# Altium PCB 74HC595.PcbDoc
Units mil, origin at the board's own origin, x right, y up, seen from the top; angles counter-clockwise.
Board outline 6000 x 4000 mil, 2 copper layers (Top Layer, Bottom Layer); 11 components, 10 nets, 52 pads, 1 vias.
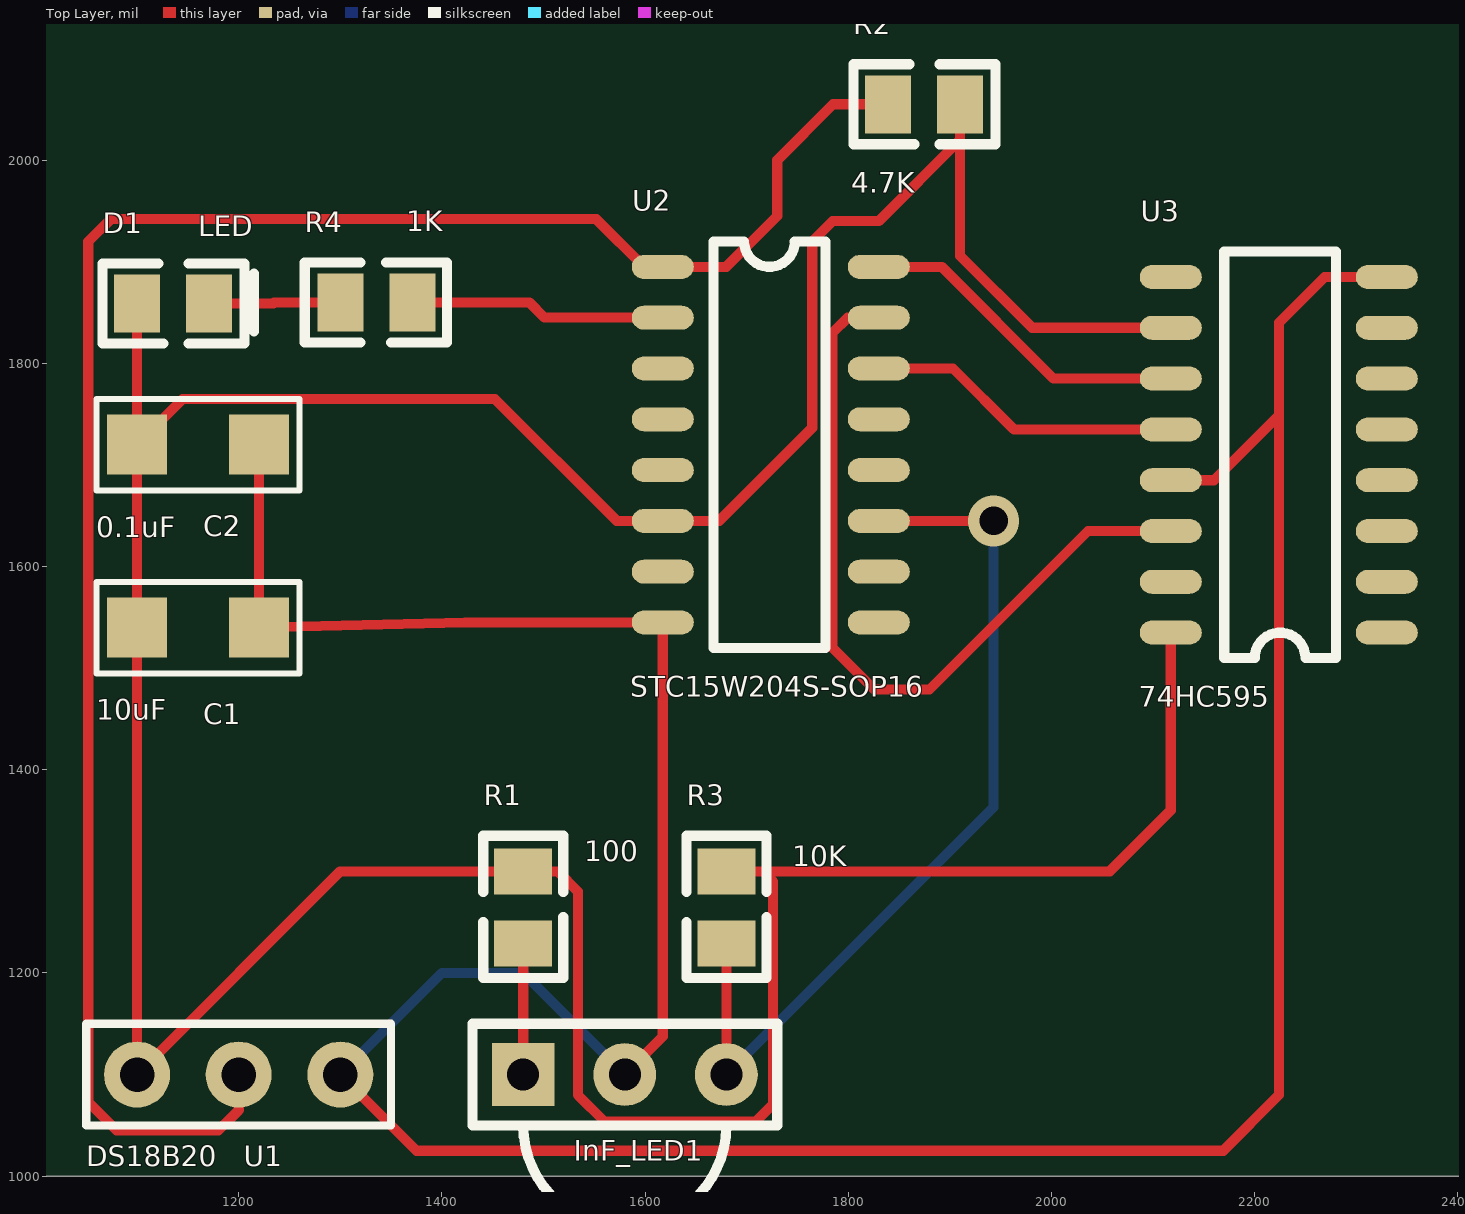
[diagram p0: Top Layer view]
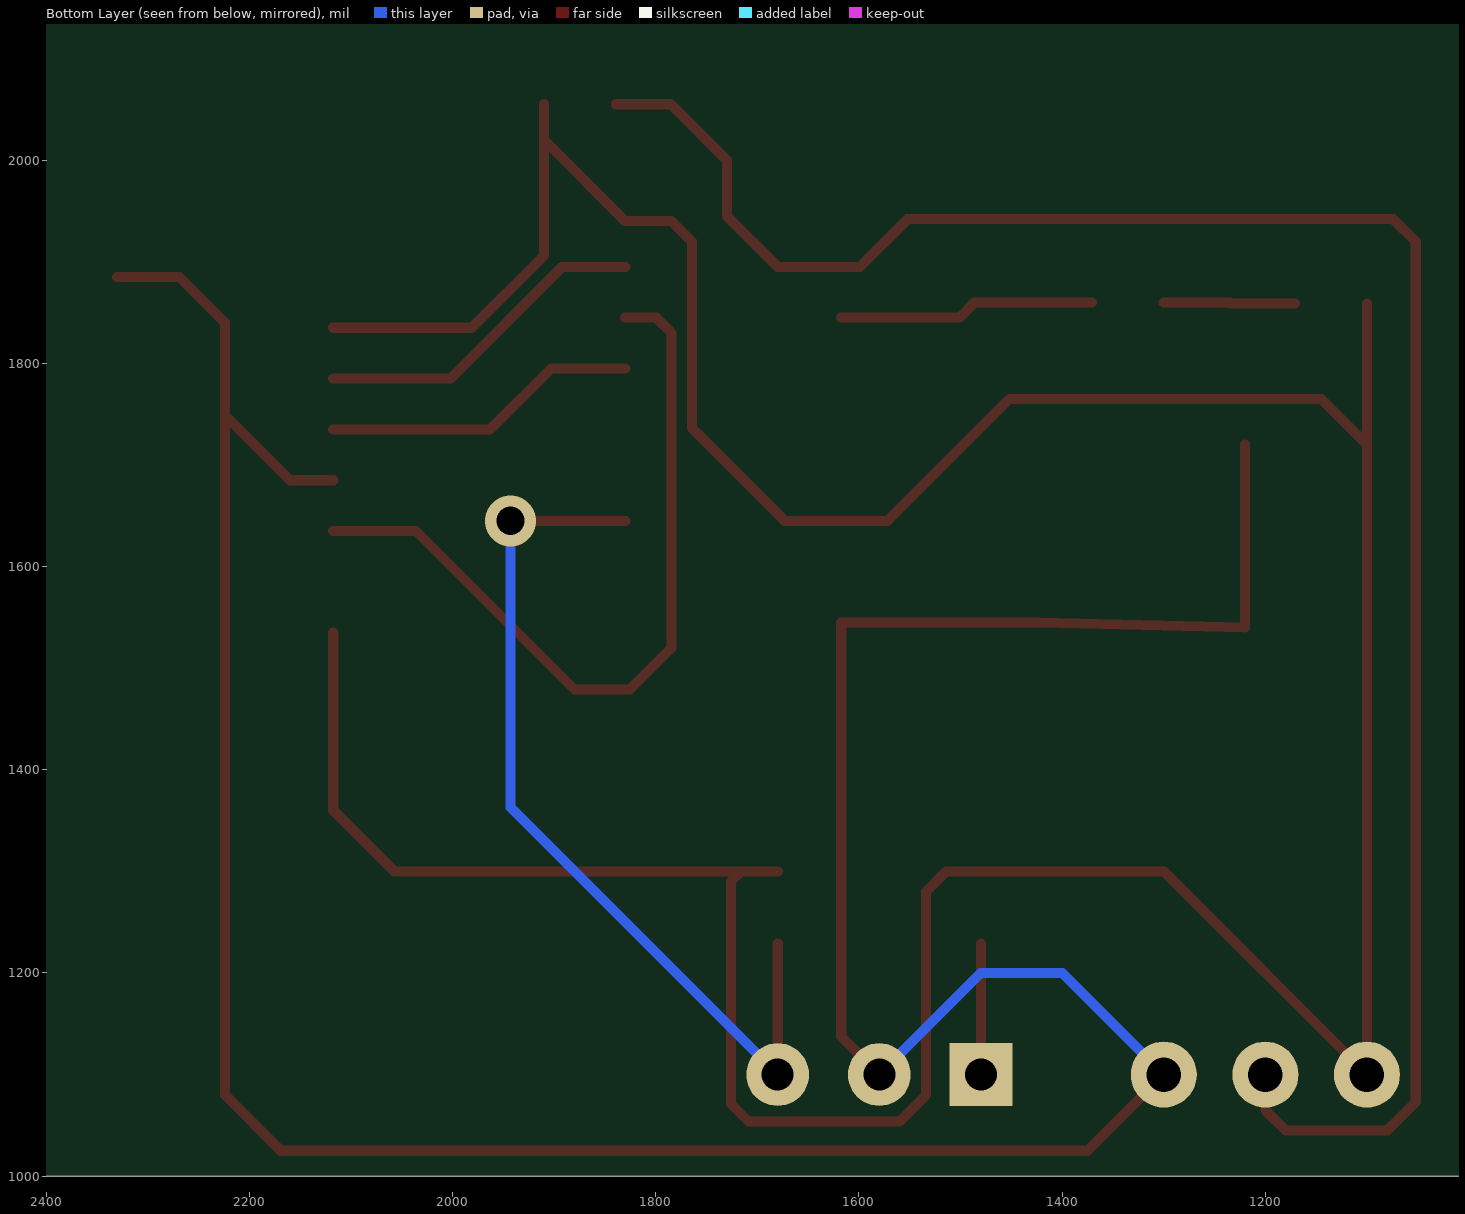
[diagram p1: Bottom Layer view, seen from below]
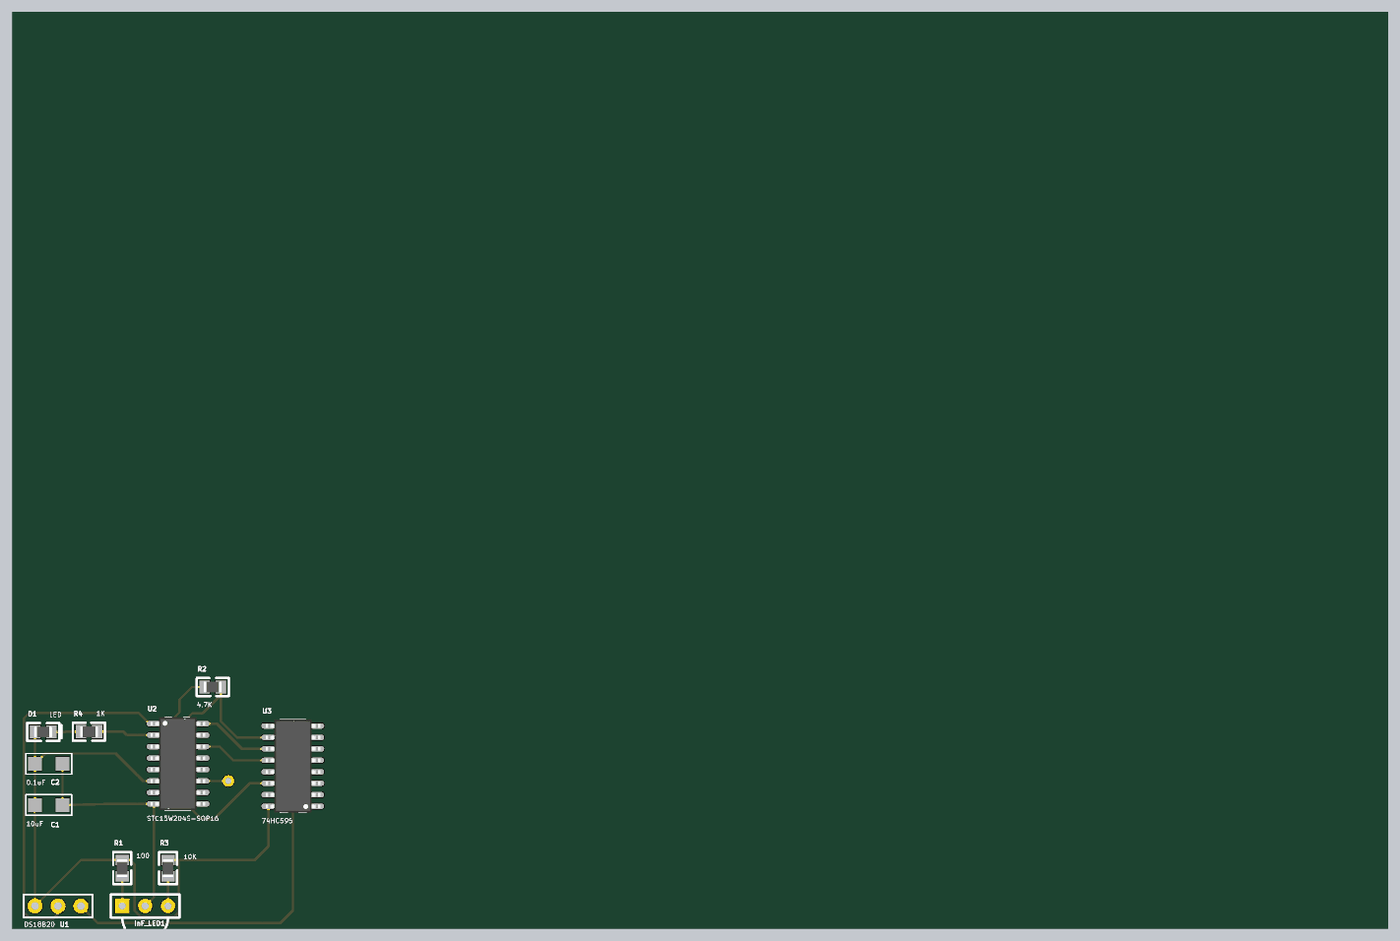
[diagram p2: 3D render of the assembled board from above, using the file's embedded part models]

## Layer stack, top to bottom
Top Solder: solder mask 0.4, Solder Resist, Dk 3.5
Top Layer: signal copper 1.4
Dielectric1: dielectric 12.6, FR-4, Dk 4.8
Bottom Layer: signal copper 1.4
Bottom Solder: solder mask 0.4, Solder Resist, Dk 3.5

## Board outline
1000,1000 7000,1000 7000,5000 1000,5000

## Design rules (kind name [scope] priority, off if disabled: settings)
Clearance [All] p1: gap=10
FabricationTestPointUsage TestPointUsage [All] p1: valid=0 allowmultiple=FALSE
FabricationTestpoint Testpoint [All] p1: side=3 testpointundercomponent=TRUE minsize=40 maxsize=100 preferedsize=60 minholesize=0 maxholesize=40 preferedholesize=32 testpointgrid=1 allowsidetop=TRUE allowsidebottom=TRUE usegrid=TRUE gridtolerance=0.01
PolygonConnect [All] p1: connectstyle=Relief reliefconductorwidth=10 reliefentries=4 polygonreliefangle="90 Angle" airgapwidth=10
RoutingVias [All] p1: holewidth=28 width=50 viastyle="Through Hole" minholewidth=28 minwidth=50 maxholewidth=28 maxwidth=50
SilkToSolderMaskClearance SilkscreenOverComponentPads [IsPad] p1: minsilkscreentomaskgap=10 clearancetoexposedcopper=TRUE
SolderMaskExpansion [All] p1: expansion=4
Width [All] p1: maxlimit=10 minlimit=10 preferedwidth=10
27 further rules are at their usual default settings.

## Components (designator, comment, footprint, x,y, rotation, side; value= is the part's Value field where it differs from the comment)
C1 "10uF" RES 1220,1540 r180 top
C2 "0.1uF" RES 1220,1720 r180 top
D1 "LED" LED0805 1100,1860 r180 top
InF_LED1 "Infrared_LED" IR 1480,1100 r0 top
R1 "100" RES0805 1480,1300 r270 top
R2 "4.7K" RES0805 1910,2055 r180 top
R3 "10K" RES0805 1680,1300 r270 top
R4 "1K" RES0805 1300,1860 r0 top
U1 "DS18B20" 3PIN 1300,1100 r180 top
U2 "STC15W204S-SOP16" SOP16 1617.4,1895 r0 top
U3 "74HC595" SOP16 2330,1535 r180 top

## Footprints (in the part's own frame and the unit in brackets; to place one, negate y for a bottom-side part, rotate by r counter-clockwise, add the part's x,y. Pads: shape width x height; smd on the part's side, far side on the other; paste and mask are expansions set on the pad)
3PIN [mil]
  round 65 hole 34: 1(0,0) 2(100,0) 3(200,0)
  silkscreen extent -50,-50 250,50
IR [mm] "IR"
  rect 1.57x1.57 hole 0.8: 1(0,0)
  round 1.57 hole 0.8: 2(2.54,0) 3(5.08,0)
  silkscreen extent -1.27,-3.81 6.35,1.27
LED0805 [mm] "LED0805"
  rect 1.15x1.45 smd: 1(0,0.025) 2(-1.8,0.025)
  silkscreen extent -2.93,-0.98 0.87,1.02, body extent -1.9,-0.57 0.1,0.63, height 0.5
RES [mm]
  rect 1.5x1.5 smd: 1(0,0) 2(3.048,0)
  silkscreen extent -1.02,-1.14 4.06,1.14
RES0805 [mm] "RES0805"
  rect 1.15x1.45 smd: 1(1.8,0) 2(0,0)
  silkscreen extent -0.89,-1 2.67,1, body extent -0.1,-0.6 1.9,0.6, height 0.5
SOP16 [mm] "SOP16"
  oval 1.55x0.6 smd: 1(0,0) 2(0,-1.27) 3(0,-2.54) 4(0,-3.81) 5(0,-5.08) 6(0,-6.35) 7(0,-7.62) 8(0,-8.89) 9(5.4,-8.89) 10(5.4,-7.62) 11(5.4,-6.35) 12(5.4,-5.08) 13(5.4,-3.81) 14(5.4,-2.54) 15(5.4,-1.27) 16(5.4,0)
  silkscreen extent 1.27,-9.53 4.06,0.64, body extent -0.36,-9.59 5.69,0.71, height 1.95

## Part data
C1 C2: library part CAP2
R1 R2 R3 R4: library part RES

## Via types
v1: diameter 50, hole 28, Top Layer to Bottom Layer, 1 vias

## Nets (pads, with @x,y where several pads share a name; then routed paths per layer and width w, separated by ;. In a path a pad name is that pad's centre, name@x,y a point inside that pad or via, vN(x,y) a via of type N, cw(c..) or ccw(c..) an arc to the next point about the centre after c; other vN are vias at no path point)
DS18B20: R2.1 U1.2 U2.1 | length 1964.1
  Top Layer w10: U1.2 1200,1065 1180,1045 1080,1045 1052,1073 1052,1920 1074,1942 1552,1942 1599,1895 U2.1 1680,1895 1730,1945 1730,2000 1785,2055 R2.1
GND: C1.1 C2.1 InF_LED1.2 U1.1 U2.8 U3.8 U3.13 | length 3396.4
  Top Layer w10: C2.1 C1.1 1423,1545 U2.8 1617.4,1137.4 InF_LED1.2 ; U1.1 1375,1025 2169,1025 2224,1080 2224,1749 ; U3.13 2160,1685 2224,1749 ; U3.8 2269,1885 2224,1840 2224,1749
  Bottom Layer w10: U1.1 1400,1200 1480,1200 InF_LED1.2
INFRARED: InF_LED1.3 R3.1 U2.11 | length 896.1
  Top Layer w10: InF_LED1.3 R3.1 ; U2.11 v1(1943,1645)
  Bottom Layer w10: InF_LED1.3 1943,1363 v1(1943,1645)
NetD1_2: D1.2 R4.2 | length 129.5
  Top Layer w10: D1.2 1234,1859.02 1234.98,1860 R4.2
NetInF_LED1_1: InF_LED1.1 R1.1 | length 129.1
  Top Layer w10: InF_LED1.1 R1.1
NetR4_1: R4.1 U2.2 | length 252.7
  Top Layer w10: R4.1 1486,1860 1501,1845 U2.2
NetU2_14: U2.14 U3.12 | length 312.3
  Top Layer w10: U2.14 1903,1795 1963,1735 U3.12
NetU2_15: U2.15 U3.14 | length 776.2
  Top Layer w10: U2.15 1799.49,1845 1784.49,1830 1784.49,1520 1825.49,1479 1880,1479 2036,1635 U3.14
NetU2_16: U2.16 U3.11 | length 333
  Top Layer w10: U2.16 1892,1895 2002,1785 U3.11
VCC: C1.2 C2.2 D1.1 R1.2 R2.2 R3.2 U1.3 U2.6 U3.10 U3.16 | length 4091.6
  Top Layer w10: D1.1 C2.2 ; R3.2 1716,1300 ; R2.2 1910,2020 ; U3.16 2117.4,1360 2057.4,1300 1716,1300 ; U3.10 1981,1835 1910,1906 1910,2020 ; C2.2 1145,1765 1452,1765 1572,1645 U2.6 1673,1645 1764.49,1736.49 1764.49,1920 1784.49,1940 1830,1940 1910,2020 ; C2.2 C1.2 U1.3 1300,1300 R1.2 1514,1300 1534,1280 1534,1079.81 1560,1053.81 1708.81,1053.81 1726,1071 1726,1290 1716,1300
pads on no net: U2.3 U2.4 U2.5 U2.7 U2.9 U2.10 U2.12 U2.13 U3.1 U3.2 U3.3 U3.4 U3.5 U3.6 U3.7 U3.9 U3.15